# EAGLE board smartThermometer (EAGLE 7.2.0)
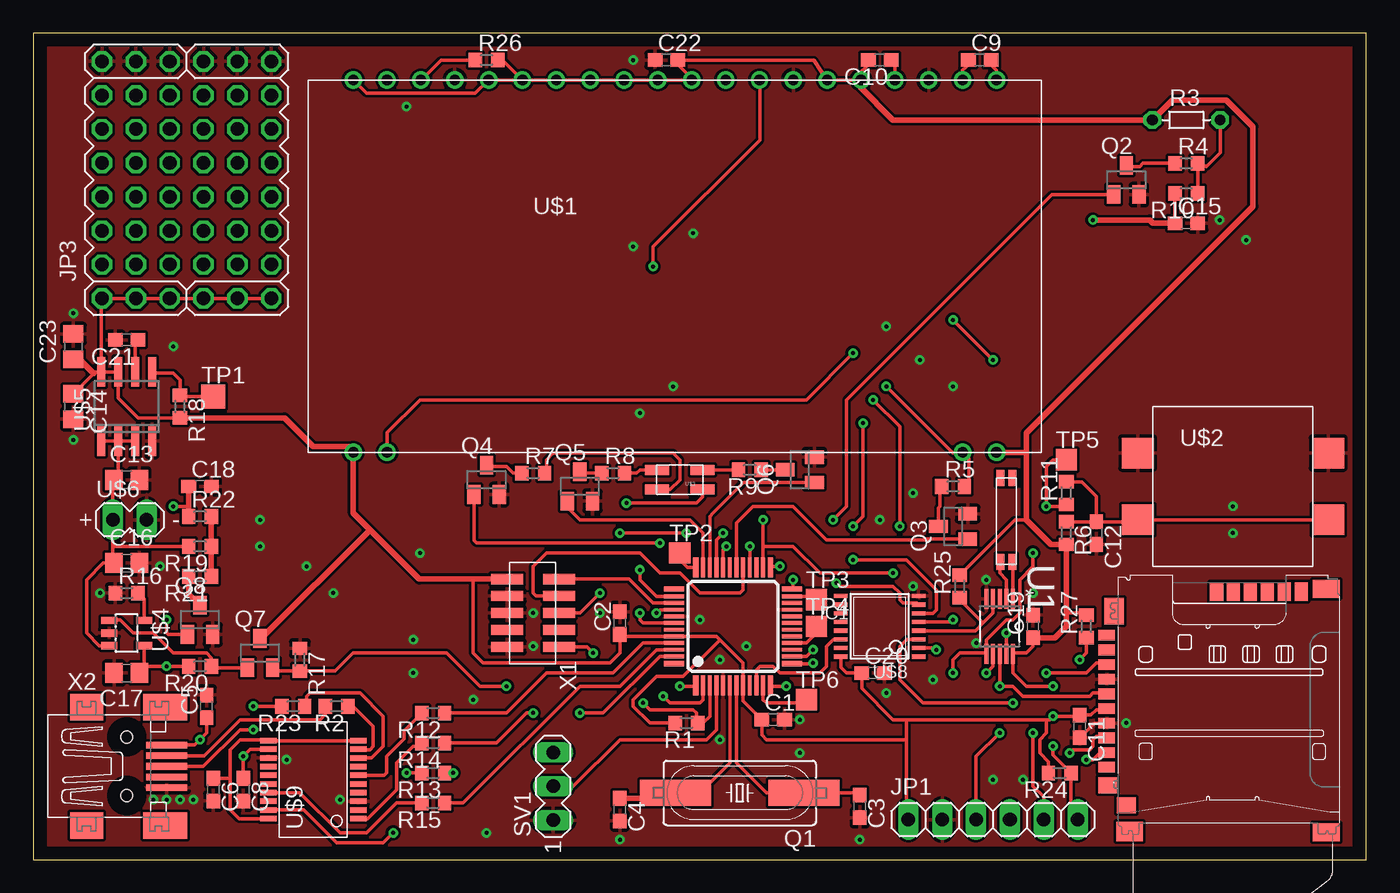
[diagram p0: board, top side]
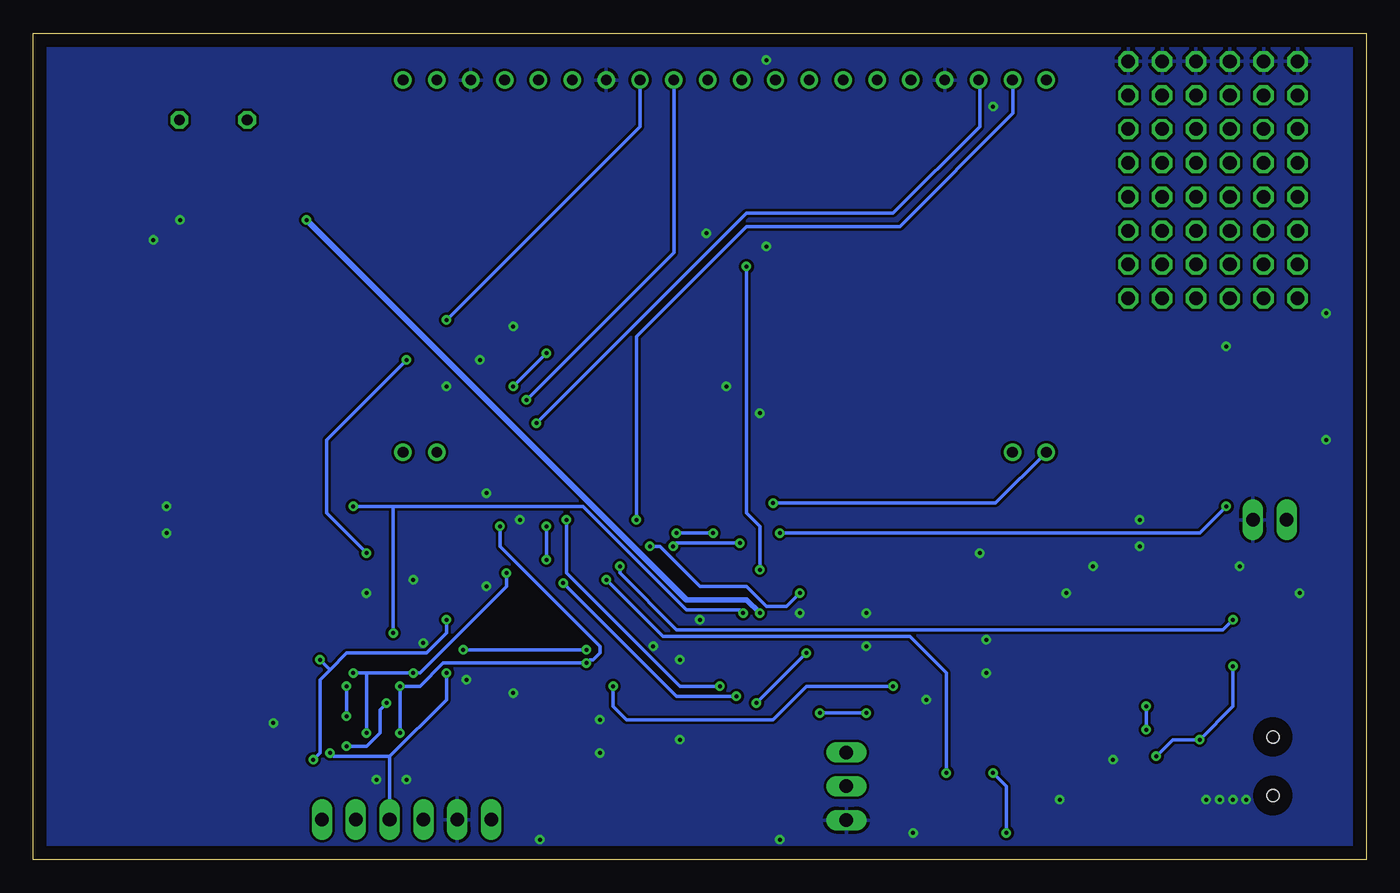
[diagram p1: board, bottom side, seen from below]

Size 100 x 62 mm. Coordinates in mm from the lower left corner, seen from the top.
Outline: 0,0 100,0 100,62 0,62 0,0
Copper layers (1*16): Top 0.035mm / dielectric 1.5mm / Bottom 0.035mm
Design rules "default *": minimum track width 0.2mm, minimum drill 0.3mm, track to track 0.2mm, track to pad 0.2mm, pad to pad 0.2mm, via to via 0.2mm, smd to smd 0mil, copper to edge 40mil, drill to drill 8mil, minimum pad ring 10mil, minimum via ring 8mil, stop-mask expansion 4mil, vias tented up to drill 0mil, thermal gap 10mil

## Footprints (pad centres in the part's own frame; a part is rotated, then mirrored left to right if it is on the bottom)
C0603 = smd 1.1 x 1: 1 -0.85,0; 2 0.85,0
C0805 = smd 1.3 x 1.5: 1 -0.95,0; 2 0.95,0
SOT313-2 = smd 0.4 x 1.5: 1 -2.81,-4.425; 12 2.81,-4.425; 25 2.81,4.425; 36 -2.81,4.425 | smd 0.28 x 1.5: 2 -2.25,-4.425; 3 -1.75,-4.425; 4 -1.25,-4.425; 5 -0.75,-4.425; 6 -0.25,-4.425; 7 0.25,-4.425; 8 0.75,-4.425; 9 1.25,-4.425; 10 1.75,-4.425; 11 2.25,-4.425; 26 2.25,4.425; 27 1.75,4.425; 28 1.25,4.425; 29 0.75,4.425; 30 0.25,4.425; 31 -0.25,4.425; 32 -0.75,4.425; 33 -1.25,4.425; 34 -1.75,4.425; 35 -2.25,4.425 | smd 1.5 x 0.4: 13 4.425,-2.81; 24 4.425,2.81; 37 -4.425,2.81; 48 -4.425,-2.81 | smd 1.5 x 0.28: 14 4.425,-2.25; 15 4.425,-1.75; 16 4.425,-1.25; 17 4.425,-0.75; 18 4.425,-0.25; 19 4.425,0.25; 20 4.425,0.75; 21 4.425,1.25; 22 4.425,1.75; 23 4.425,2.25; 38 -4.425,2.25; 39 -4.425,1.75; 40 -4.425,1.25; 41 -4.425,0.75; 42 -4.425,0.25; 43 -4.425,-0.25; 44 -4.425,-0.75; 45 -4.425,-1.25; 46 -4.425,-1.75; 47 -4.425,-2.25
1X06 = drill 1.016 long: 1 -6.35,0; 2 -3.81,0; 3 -1.27,0; 4 1.27,0; 5 3.81,0; 6 6.35,0
PROTOTYPE8X6 = drill 1.016 octagon: 1 -6.35,-6.35; 2 -3.81,-6.35; 3 -1.27,-6.35; 4 1.27,-6.35; 5 3.81,-6.35; 6 6.35,-6.35; 7 -6.35,-3.81; 8 -3.81,-3.81; 9 -1.27,-3.81; 10 1.27,-3.81; 11 3.81,-3.81; 12 6.35,-3.81; 13 -6.35,-1.27; 14 -3.81,-1.27; 15 -1.27,-1.27; 16 1.27,-1.27; 17 3.81,-1.27; 18 6.35,-1.27; 19 -6.35,1.27; 20 -3.81,1.27; 21 -1.27,1.27; 22 1.27,1.27; 23 3.81,1.27; 24 6.35,1.27; 25 -6.35,3.81; 26 -3.81,3.81; 27 -1.27,3.81; 28 1.27,3.81; 29 3.81,3.81; 30 6.35,3.81; 31 -6.35,6.35; 32 -3.81,6.35; 33 -1.27,6.35; 34 1.27,6.35; 35 3.81,6.35; 36 6.35,6.35; GND1_1 8.89,6.35; GND1_2 8.89,3.81; GND1_3 8.89,1.27; GND2_1 8.89,-1.27; GND2_2 8.89,-3.81; GND2_3 8.89,-6.35; VCC_1 -8.89,-1.27; VCC_2 -8.89,-3.81; VCC_3 -8.89,-6.35; VDD_1 -8.89,6.35; VDD_2 -8.89,3.81; VDD_3 -8.89,1.27
HC49UP = smd 5.334 x 1.93: 1 -4.826,0; 2 4.826,0
SOT23 = smd 1 x 1.4: 1 -0.95,-1.1; 2 0.95,-1.1; 3 0,1.1
R0603 = smd 1 x 1.1: 1 -0.85,0; 2 0.85,0
R-5 = drill 0.813 octagon: 1 -2.54,0; 2 2.54,0
MA03-1 = drill 1.016 long: 1 -2.54,0; 2 0,0; 3 2.54,0
TP18SQ = smd 1.8 x 1.8: TP 0,0
TP16SQ = smd 1.6 x 1.6: TP 0,0
SOP50P490X110-10N = smd 1.499 x 0.3: 1 -2.057,1; 2 -2.057,0.5; 3 -2.057,0; 4 -2.057,-0.5; 5 -2.057,-1; 6 2.057,-1; 7 2.057,-0.5; 8 2.057,0; 9 2.057,0.5; 10 2.057,1
LCD_FOOTPRINT = drill 0.8: 1 0,-27.94; 2 2.54,-27.94; 19 45.72,-27.94; 20 48.26,-27.94; 21 48.26,0; 22 45.72,0; 23 43.18,0; 24 40.64,0; 25 38.1,0; 26 35.56,0; 27 33.02,0; 28 30.48,0; 29 27.94,0; 30 25.4,0; 31 22.86,0; 32 20.32,0; 33 17.78,0; 35 15.24,0; 36 10.16,0; 37 7.62,0; 38 5.08,0; 39 2.54,0; 40 0,0; P$6 12.7,0
PUSHBUTTON-OMRON-B3FS-4002P = smd 2.4 x 2.3: 1 7.15,-2.5; 2 -7.15,-2.5; 3 7.15,2.5; 4 -7.15,2.5
LED-RGB-EVERLIGHT = smd 1.8 x 0.75: 1 1.7,0.725; 2 1.7,-0.725; 3 -1.7,-0.725; 4 -1.7,0.725
SOT23-5L = smd 0.55 x 1.2: 1 -0.95,-1.3; 2 0,-1.3; 3 0.95,-1.3; 4 0.95,1.3; 5 -0.95,1.3
SO08 = smd 0.6 x 2.2: 1 -1.905,-2.6; 2 -0.635,-2.6; 3 0.635,-2.6; 4 1.905,-2.6; 5 1.905,2.6; 6 0.635,2.6; 7 -0.635,2.6; 8 -1.905,2.6
MA02-1+- = drill 1.016 long: 1 -2.54,0; 2 0,0
32.768KHZ = smd 1.2 x 0.6: 1 -3.15,0.45; 2 3.15,0.45; 3 3.15,-0.45; 4 -3.15,-0.45
TSSOP16 = smd 0.305 x 0.991: 1 -2.275,-2.918; 2 -1.625,-2.918; 3 -0.975,-2.918; 4 -0.325,-2.918; 5 0.325,-2.918; 6 0.975,-2.918; 7 1.625,-2.918; 8 2.275,-2.918; 9 2.275,2.918; 10 1.625,2.918; 11 0.975,2.918; 12 0.325,2.918; 13 -0.325,2.918; 14 -0.975,2.918; 15 -1.625,2.918; 16 -2.275,2.918
SSOP20 = smd 0.42 x 1.25: P$1 -2.925,-3.375; P$2 -2.275,-3.375; P$3 -1.625,-3.375; P$4 -0.975,-3.375; P$5 -0.325,-3.375; P$6 0.325,-3.375; P$7 0.975,-3.375; P$8 1.625,-3.375; P$9 2.275,-3.375; P$10 2.925,-3.375; P$11 2.925,3.375; P$12 2.275,3.375; P$13 1.625,3.375; P$14 0.975,3.375; P$15 0.325,3.375; P$16 -0.325,3.375; P$17 -0.975,3.375; P$18 -1.625,3.375; P$19 -2.275,3.375; P$20 -2.925,3.375
HEADER10 = smd 0.76 x 2.4: P1 -2.54,-1.95; P2 -2.54,1.95; P3 -1.27,-1.95; P4 -1.27,1.95; P5 0,-1.95; P6 0,1.95; P7 1.27,-1.95; P8 1.27,1.95; P9 2.54,-1.95; P10 2.54,1.95
32005-301 = smd 3.1 x 0.5: 1 3,1.6; 2 3,0.8; 3 3,0; 4 3,-0.8; 5 3,-1.6 | smd 2.5 x 2: M1 -3,-4.45; M2 -3,4.45 | smd 3.3 x 2: M3 2.9,4.45; M4 2.9,-4.45 | hole 0.9: 0,2.2; 0,-2.2
SIM-CARD_496191611 = smd 2 x 1.35: G1 1,18.938; G2 1,0.675 | smd 2 x 1.45: G3 15.75,18.887 | smd 1.45 x 2: G4 16.925,2.35 | smd 1.25 x 0.8: S1 17.475,4.162; S5 17.475,14.062; T1 17.475,12.963; T2 17.475,11.863; T3 17.475,10.762; T4 17.475,9.662; T5 17.475,8.562; T6 17.475,7.463; T7 17.475,6.362; T8 17.475,5.263 | smd 0.98 x 1.4: S2 9.225,0.9; S3 6.685,0.9; S4 4.145,0.9; S6 7.955,0.9; S7 5.415,0.9; S8 2.875,0.9 | smd 1.4 x 1.2: ST1 17.4,15.412; ST2 16,16.913

## Placement (x,y rotation side)
C1  100n  [C0603]  55.5,10.5 0 top
C2  100n  [C0603]  44,17.75 90 top
C3  18pF  [C0603]  62,4 270 top
C4  18pF  [C0603]  44,3.75 270 top
C5  10n  [C0603]  13,11.5 90 top
C6  100n  [C0603]  13.5,5.25 270 top
C8  100n  [C0603]  15.75,5.25 270 top
C9  100n  [C0603]  71,60 0 top
C10  100u  [C0603]  63.5,60 180 top
C11  100n  [C0603]  78.5,10 270 top
C12  100n  [C0603]  79.75,24.5 270 top
C13  4,7u  [C0805]  7,28.5 0 top
C14  4,7u  [C0805]  3,34 270 top
C15  100n  [C0603]  86.5,47.75 0 top
C16  4,7u  [C0805]  7,22.25 0 top
C17  4,7u  [C0805]  7,14 180 top
C18  100n  [C0603]  12.5,28 0 top
C19  100n  [C0603]  75,17.5 90 top
C20  100n  [C0603]  63,14 0 top
C21  1n  [C0603]  7,39 180 top
C22  100n  [C0603]  47.5,60 0 top
C23  4,7u  [C0805]  3,38.5 90 top
IC1  LPC11C24FBD48  [SOT313-2]  52.5,17.5 0 top
JP1  [1X06]  72,3 0 top
JP3  [PROTOTYPE8X6]  11.5,51 90 top
Q1  12MHz  [HC49UP]  53,5 180 top
Q2  BSS123  [SOT23]  82,51 0 top
Q3  BSS123  [SOT23]  69,25 90 top
Q4  BSS123  [SOT23]  34,28.5 0 top
Q5  BSS123  [SOT23]  41,28 0 top
Q6  BSS123  [SOT23]  57.5,29.25 90 top
Q7  BSS123  [SOT23]  17,15.5 0 top
Q8  BSS123  [SOT23]  12.5,18 0 top
R1  10k  [R0603]  49,10.25 180 top
R2  27  [R0603]  22.75,11.5 180 top
R3  THERMISTOR-5  [R-5]  86.5,55.5 0 top
R4  1k  [R0603]  86.5,52.25 0 top
R5  1k  [R0603]  69,28 0 top
R6  10k  [R0603]  77.5,24.5 270 top
R7  1k  [R0603]  37.5,29 0 top
R8  1k  [R0603]  43.5,29 0 top
R9  1k  [R0603]  53.75,29.25 180 top
R10  1k  [R0603]  86.5,50 180 top
R11  1k  [R0603]  77.5,27.5 90 top
R12  10k  [R0603]  30,11 180 top
R13  10k  [R0603]  30,6.5 180 top
R14  10k  [R0603]  30,8.75 180 top
R15  10k  [R0603]  30,4.25 180 top
R16  2k  [R0603]  7,20 0 top
R17  ???  [R0603]  20,15 270 top
R18  100k  [R0603]  11,34 270 top
R19  2k  [R0603]  12.5,23.5 180 top
R20  10k  [R0603]  12.5,14.5 180 top
R21  2k  [R0603]  12.5,21.25 180 top
R22  1k  [R0603]  12.5,25.75 0 top
R23  27  [R0603]  19.5,11.5 180 top
R24  10k  [R0603]  77,6.5 180 top
R25  10k  [R0603]  69.5,20.5 90 top
R26  10k  [R0603]  34,60 0 top
R27  10k  [R0603]  79,17.5 90 top
SV1  0  [MA03-1]  39,5.5 90 top
TP1  TPTP18SQ  [TP18SQ]  13.5,34.75 0 top
TP2  TPTP16SQ  [TP16SQ]  48.5,23 0 top
TP3  TPTP16SQ  [TP16SQ]  58.75,19.5 0 top
TP4  TPTP16SQ  [TP16SQ]  58.75,17.5 0 top
TP5  TPTP16SQ  [TP16SQ]  77.5,30 0 top
TP6  TPTP16SQ  [TP16SQ]  58,12 0 top
U1  MCP79510-I/MS  [SOP50P490X110-10N]  72.5,17.5 270 top
U$1  EADOGM162W-A  [LCD_FOOTPRINT]  24,58.5 0 top
U$2  PUSHBUTTON-OMRON  [PUSHBUTTON-OMRON-B3FS-4002P]  90,28 0 top
U$3  LED-RGB-EVERLIGHT  [LED-RGB-EVERLIGHT]  48.5,28.5 180 top
U$4  MCP73831/2  [SOT23-5L]  7,17 270 top
U$5  MCP1725  [SO08]  7,34 0 top
U$6  BATT-3.7V  [MA02-1+-]  8.5,25.5 0 top
U$7  CRYSTAL-32.768KHZ-GEYER  [32.768KHZ]  73,25.5 90 top
U$8  DEMUX-1-4-NXP  [TSSOP16]  63.5,17.5 90 top
U$9  FT231XS  [SSOP20]  21,6 90 top
X1  JTAGHEADER  [HEADER10]  37.5,18.5 270 top
X2  MINI-USB-32005-301  [32005-301]  7,7 0 top
X3  SIM-CARD_496191611  [SIM-CARD_496191611]  98,21 180 top

## Library data of the parts
C1-C6 C8-C23 R1 R2 R4-R27 = rcl
IC1 X1 = E7020E
JP1 = pinhead
JP3 = prototyping_small
Q1 = crystal; OC_FARNELL: unknown; OC_NEWARK: unknown
Q2-Q8 = transistor-small-signal
R3 = varistor
SV1 = con-lstb; OC_FARNELL: unknown; OC_NEWARK: unknown
TP1-TP6 = testpad
U1 = Microchip-MCP795xx; MPN: MCP79510-I/MS; OC_FARNELL: 2361124; OC_NEWARK: 47T5346; PACKAGE: 10MSOP; SUPPLIER: MICROCHIP
U$1-U$3 U$5 U$6 U$8 U$9 = user
U$4 = maxim
U$7 = Geyer
X2 = con-cypressindustries; OC_FARNELL: unknown; OC_NEWARK: unknown
X3 = con-molex

## Nets
+3V3: C1.1 C2.1 C10.2 C11.1 C14.1 C19.1 C20.1 C22.2 C23.1 IC1.8 IC1.44 JP1.1 JP3.VCC_1 JP3.VCC_2 JP3.VCC_3 JP3.VDD_1 JP3.VDD_2 JP3.VDD_3 Q7.3 R1.2 R3.1 R6.2 R18.2 R24.2 R25.2 R26.2 R27.2 U1.10 U$1.1 U$1.20 U$1.25 U$1.26 U$1.30 U$1.31 U$1.32 U$1.33 U$1.35 U$1.36 U$1.40 U$1.P$6 U$3.4 U$5.7 U$5.8 U$8.16 X1.P1 X3.T4
+5V: C5.1 C8.1 C17.1 R20.2 U$4.4 U$9.P$12 X2.1
ADC: R3.2 R4.2 R10.1
ADC-BATTERY: C18.1 IC1.33 R22.1
ADC-TEMP: C15.1 IC1.42 R10.2
BAT-ADC-EN: IC1.25 Q8.1
BLUE-PWM: IC1.32 Q4.1
BUTTON#/RTC-MFP#/WAKEUP#: IC1.40 R11.1 TP5.TP U1.9
CHARGING-STATUS: IC1.12 Q7.2 R17.2
CTS#: IC1.24 R13.1
GND: C1.2 C2.2 C3.2 C4.2 C5.2 C6.2 C8.2 C11.2 C12.2 C13.2 C14.2 C15.2 C16.2 C17.2 C18.2 C19.2 C20.2 C21.2 C22.1 C23.2 IC1.5 IC1.21 IC1.41 JP1.2 JP3.GND1_1 JP3.GND1_2 JP3.GND1_3 JP3.GND2_1 JP3.GND2_2 JP3.GND2_3 Q2.2 Q3.2 Q4.2 Q5.2 Q6.2 Q8.2 R16.1 R17.1 SV1.1 U1.5 U$1.23 U$1.27 U$1.37 U$2.3 U$2.4 U$4.2 U$5.4 U$6.2 U$8.8 U$9.P$3 U$9.P$13 X1.P3 X1.P5 X1.P9 X2.5 X3.T3 X3.T6
GPIO-CS0: IC1.10 U$8.14
GPIO-CS1: IC1.14 U$8.2
GREEN-PWM: IC1.35 Q5.1
JTAG_TCLK_SWCLK: IC1.29 X1.P4
JTAG_TMS_SWDIO: IC1.39 X1.P2
JTAG_TMS_SWO: IC1.28 X1.P6
LCD-CS: R26.1 U$1.38 U$8.6
N$1: R2.2 X2.2
N$2: R23.2 X2.3
N$3: C3.1 IC1.7 Q1.1
N$4: C4.1 IC1.6 Q1.2
N$5: C9.2 U$1.21
N$6: C6.1 U$9.P$10 U$9.P$11 U$9.P$20
N$7: C9.1 U$1.22
N$8: C10.1 U$1.24
N$9: Q2.3 R4.1
N$10: R5.2 U$1.2 U$1.19
N$11: Q3.3 R5.1
N$12: R2.1 U$9.P$9
N$13: R8.2 U$3.2
N$14: R7.2 U$3.1
N$15: R9.2 U$3.3
N$16: Q4.3 R7.1
N$17: Q5.3 R8.1
N$18: Q6.3 R9.1
N$19: IC1.4 SV1.2
N$20: C13.1 C16.1 R19.2 U$4.3 U$5.1 U$5.2 U$5.3 U$6.1
N$21: R16.2 U$4.5
N$22: R19.1 R21.1 R22.2
N$23: Q7.1 R20.1 U$4.1
N$24: R14.2 U$9.P$1
N$25: R15.2 U$9.P$17
N$26: C21.1 U$5.6
N$27: R18.1 TP1.TP U$5.5
N$28: R13.2 U$9.P$19
N$29: R12.2 U$9.P$6
N$30: U1.1 U$7.4
N$31: U1.2 U$7.1
N$32: Q8.3 R21.2
N$33: R23.1 U$9.P$8
N$34: IC1.36 TP2.TP
N$35: IC1.23 TP3.TP
N$36: IC1.16 TP4.TP
N$37: IC1.11 TP6.TP
N$38: C12.1 R6.1 R11.2 U$2.1 U$2.2
PWM-BACKLIGHT: IC1.30 Q3.1
RED-PWM: IC1.34 Q6.1
RESET: IC1.3 R1.1 X1.P10
RTS#: IC1.45 R12.1
RXD: IC1.46 R15.1
SPI-CLK: IC1.13 JP1.3 U1.8 U$1.29 X3.T5
SPI-EXT-CS: JP1.6 R24.1 U$8.3
SPI-MASTER-CS: IC1.2 U$8.7
SPI-MISO: IC1.26 JP1.5 U1.7 U$1.39 X3.T7
SPI-MOSI: IC1.38 JP1.4 U1.6 U$1.28 X3.T2
SPI-RTC-CS#: R25.1 U1.4 U$8.4
SPI-SD-CS: R27.1 U$8.5 X3.T1
THERMISTOR-EN: IC1.1 Q2.1
TXD: IC1.47 R14.1

## Tracks (layer width: path | path; a pad name or v marks a point on that pad's centre or on a via)
+3V3  (via drill 0.3, 0.3 pad 0.25)
  Top 0.254: U$5.8 U$5.7 6.37,34.63 7.85,33.15 R18.2 | U$5.8 4.65,36.6 4.53,36.48 C14.1 | C20.1 61.81,14 | 51.5,16.5 51.25,16.75 IC1.44 44.15,16.75 C2.1 44,15.5 43.25,14.75 33.75,14.75 33,15.5 33,21.04 | 51.5,16.5 53.25,14.75 IC1.8 53.25,11.9 C1.1 54.65,9.35 55,9 65.5,9 | 51.5,16.5 48.75,13.75 46.75,13.75 45,12 45,11.5 46.25,10.25 R1.2 | U$8.16 60.58,14.42 61,14 C20.1 | C19.1 75,16 74.5,15.5 73.56,15.5 U1.10 73.5,14 74.5,13 v76.5,13 | C20.1 62.15,12.85 64.5,10.5 65.5,10.5 | 65.5,10.5 76,10.5 | 76,10.5 76.25,10.5 v76.5,10.75 78.4,10.75 C11.1 79.35,10.85 79.75,11.25 80.44,11.25 X3.T4 | U$1.P$6 U$1.36 33.16,57.5 25,57.5 U$1.40 | U$1.P$6 U$1.35 U$1.33 U$1.32 U$1.31 U$1.30 49.4,58.6 48.5,59.5 48.5,59.85 C22.2 58.56,60 U$1.26 U$1.25 62.1,59.1 62.5,59.5 62.5,59.85 C10.2 | U$3.4 50.2,27.2 49.75,26.75 v44.5,26.75 | JP1.1 65.5,3.15 65.5,9 | 65.5,9 65.5,10.5 | U$5.8 5.09,42.05 JP3.VDD_1 JP3.VDD_2 JP3.VDD_3 JP3.VCC_1 JP3.VCC_2 JP3.VCC_3 | R24.2 76.15,7.35 75.5,8 75.5,9 76,9.5 76,10.5 | R25.2 73.65,25.5 74.5,25.5 | R27.2 78.85,18.5 77.5,18.5 | R26.2 35.2,60 U$1.P$6
  Top 0.406: X1.P1 33,21.04 28.96,21.04 25.25,24.75 | 25.25,24.75 24,26 U$1.1 23.94,31 21,31 18.85,33.15 R18.2 | Q7.3 17.1,16.6 25.25,24.75 | C19.1 76.65,16.65 77.5,17.5 77.5,18.5 R6.2 76.35,23.65 74.5,25.5 74.5,30.5 | C23.1 3.45,37.55 4.53,36.48 | 74.5,30.5 74.5,32 91.5,49 91.5,55 89.5,57 85.46,57 R3.1 64.5,55.5 62,58 62,58.4 U$1.25 | U$1.20 74.44,30.56 74.5,30.5
  Bottom 0.254: v76.5,13 v76.5,10.75 | v44.5,26.75 27.81,26.75 U$1.1
+5V  (via drill 0.3)
  Top 0.254: U$4.4 8.3,14.35 C17.1 8.45,14.5 v10,14.5 R20.2 | U$9.P$12 16.27,8.28 v15.75,7.75 C8.1 | X2.1 12.1,8.6 v12.5,9 13,9.5 C5.1
  Bottom 0.254: v15.75,7.75 14.5,9 v12.5,9 10,11.5 v10,14.5
ADC
  Top 0.254: R10.1 R4.2 88,52 89.04,53.04 R3.2
ADC-BATTERY  (via drill 0.3 pad 0.25)
  Top 0.254: IC1.33 51.25,24 v51.75,24.5 | v49,24.5 v44,24.5 | v10.5,26.5 11.65,26.5
  Top 0.406: C18.1 11.65,26.5 R22.1
  Bottom 0.254: v44,24.5 12.5,24.5 v10.5,26.5 | v49,24.5 v51.75,24.5
ADC-TEMP  (via drill 0.3 pad 0.25)
  Top 0.254: R10.2 C15.1 | IC1.42 45.75,17.75 45.5,18 v45.5,18.5
  Top 0.406: v79.5,48 83.75,48 84,47.75 C15.1
  Bottom 0.406: v79.5,48 51,19.5 46.5,19.5 v45.5,18.5
BAT-ADC-EN  (via drill 0.3 pad 0.25)
  Top 0.254: Q8.1 10.1,16.9 10,17 v10,18 | v56,22 55.38,22 IC1.25
  Bottom 0.254: v56,22 56,21.5 51.75,17.25 10.75,17.25 v10,18
BLUE-PWM  (via drill 0.3, 0.3 pad 0.25)
  Top 0.254: Q4.1 33.05,23.95 33.25,23.75 v47,23.75 | IC1.32 51.75,23.25 v52,23.5
  Bottom 0.254: v52,23.5 51.75,23.75 v47,23.75
BUTTON#/RTC-MFP#/WAKEUP#  (via drill 0.3)
  Top 0.254: IC1.40 47,18.75 v46.75,18.5 | R11.1 77.35,26.5 v76,26.5 76,29.5 76.5,30 TP5.TP | U1.9 v73,17
  Bottom 0.254: v46.75,18.5 47,18.75 51,18.75 58.75,26.5 73,26.5 | v76,26.5 73,26.5 | v73,17 73,26.5
CHARGING-STATUS  (via drill 0.3 pad 0.25)
  Top 0.254: Q7.2 18.2,14.15 R17.2 22.65,14.15 24,15.5 31,15.5 33.5,13 v35.5,13 | v56.5,13 55.38,13 IC1.12
  Bottom 0.254: v35.5,13 42,13 44.5,10.5 55.5,10.5 56.5,11.5 v56.5,13
CTS#  (via drill 0.3 pad 0.25)
  Top 0.254: v57,21 57,20.39 IC1.24 | v31.5,6.5 R13.1
  Bottom 0.254: v31.5,6.5 31.5,14 34.25,16.75 52.75,16.75 v57,21
GND  (via drill 0.3, 0.3 pad 0.25)
  Top 0.254: C11.2 79.59,10.24 X3.T3
  other vias: 66,20.5 64,12.5 51.5,9 57.5,10.5 42.5,18.5 5,20 45,60 51.5,15 50,18 53.5,16 17,25.5 17,23.5 10.5,38.5 12,4.5 34,2 33,12 28.5,14 19,7.5 23,4.5 28.5,16.5 20.5,22 22.5,20 29,23 45.5,33.5 48,35.5 28,56.5 89,48 91,46.5 90,24.5 90,26.5 75,20 37.5,18.5 37.5,16 45,46 49.5,47 82,10.25 71.5,21 66.5,37.5 69,35.5 11,4.5 10,4.5 9,4.5 9.5,22 3,41 3,31.5 74.25,6 72,6 62,1.5 44,1.5 57.5,8 64,40 70.75,16.25 67.5,13.5 66,27.5 63.5,25.5
  pour Top: -0.5,62.5 101,62.5 101,-1.5 -0.5,-1.5
  pour Bottom: -0.5,63 101,63 101,-1.5 -0.5,-1.5
GPIO-CS0
  Top 0.254: IC1.10 54.25,14.25 54.5,14.5 55.5,14.5 56,14 59,14 59.5,14.5 59.5,16 60,16.5 60.56,16.5 U$8.14
GPIO-CS1  (via drill 0.3 pad 0.25)
  Top 0.254: IC1.14 58,15.25 v58.5,15.75 | U$8.2 67.62,15.88 v67.75,15.75
  Bottom 0.254: v58.5,15.75 v67.75,15.75
GREEN-PWM
  Top 0.254: Q5.1 40.05,26.45 41,25.5 49.25,25.5 50.25,24.5 IC1.35
JTAG_TCLK_SWCLK
  Top 0.254: X1.P4 37.73,19.77 37.5,20 37.5,22 38.5,23 45.5,23 47,21.5 48.5,21.5 50,20 53,20 53.25,20.25 IC1.29
JTAG_TMS_SWDIO
  Top 0.254: X1.P2 44.71,21.04 46.5,19.25 IC1.39
JTAG_TMS_SWO  (via drill 0.3, 0.3 pad 0.25)
  Top 0.254: X1.P6 41,18.5 v42.5,20 | v53.75,23.5 IC1.28
  Bottom 0.254: v53.75,23.5 53,23.5 50,20.5 46.5,20.5 45,19 43.5,19 v42.5,20
LCD-CS  (via drill 0.3, 0.3 pad 0.25)
  Top 0.254: U$8.6 67.47,18.48 67.75,18.75 67.75,20.25 65.5,22.5 v61.5,22.5 | v62.25,32.75 62.25,25.75 v61.5,25 | R26.1 30.58,60 U$1.38
  Bottom 0.254: v62.25,32.75 46.5,48.5 35.5,48.5 29,55 29,58.42 U$1.38 | v61.5,22.5 v61.5,25
N$1
  Top 0.254: X2.2 12.8,7.8 15.5,10.5 21.5,10.5 21.9,10.9 R2.2
N$2  (via drill 0.3)
  Top 0.254: X2.3 12.75,7 15.5,9.75 v16.5,9.75 | v16.5,11.5 R23.2
  Bottom 0.254: v16.5,9.75 v16.5,11.5
N$3
  Top 0.254: IC1.7 52.75,7.25 55,5 Q1.1 61.85,5 C3.1
N$4
  Top 0.254: 48.29,4.7 Q1.2 50,5 52.25,7.25 IC1.6
  Top 0.406: C4.1 47.77,4.6 Q1.2
N$5
  Top 0.254: U$1.21 72.26,59.24 72,59.5 72,59.85 C9.2
N$6
  Top 0.254: U$9.P$10 U$9.P$11 17.55,9 15.5,9 14.75,8.25 14.75,6 | U$9.P$20 15.43,3.08 14.75,3.75 14.75,6 | C6.1 14.65,6.1 14.75,6
N$7
  Top 0.254: U$1.22 69.72,59.22 70,59.5 70,59.85 C9.1
N$8
  Top 0.254: U$1.24 64.64,59.71 C10.1
N$9
  Top 0.254: R4.1 83.25,52.25 83,52 82.1,52 Q2.3
N$10  (via drill 0.3 pad 0.25)
  Top 0.254: R5.2 70.2,28.2 70.2,30.08 U$1.19 69.66,30.5 69,30.5 v64,35.5 | U$1.2 26.54,32.04 29,34.5 58,34.5 v61.5,38
  Bottom 0.254: v61.5,38 v64,35.5
N$11
  Top 0.254: Q3.3 67.9,26.4 68,26.5 68,27.85 R5.1
N$12
  Top 0.254: R2.1 24,11.5 25.5,10 25.5,8.5 25.25,8.25 24.4,8.25 U$9.P$9
N$13
  Top 0.254: R8.2 45.25,29 45.5,29.25 46.77,29.25 U$3.2
N$14
  Top 0.254: 46.77,27.77 U$3.1 47.77,27.77 48.5,28.5 48.5,30 48,30.5 39,30.5 38.5,30 38.5,29.15 R7.2
N$15
  Top 0.254: U$3.3 52.88,29.23 R9.2
N$16
  Top 0.254: R7.1 36,29 35.5,29.5 34.1,29.5 Q4.3
N$17
  Top 0.254: R8.1 41.1,29 Q5.3
N$18
  Top 0.254: Q6.3 R9.1
N$19
  Top 0.254: IC1.4 51.25,9.75 50.5,9 44,9 40.5,5.5 SV1.2
N$20
  Top 0.254: 5.96,23.5 U$6.1 5.96,28.41 C13.1 6.37,28.82 U$5.2 | 5.96,23.5 5.96,22.09 C16.1 5.25,22.25 4,21 4,17 4.95,16.05 U$4.3 | R19.2 5.96,23.5 | U$5.3 U$5.2 | U$5.1 U$5.2
N$21
  Top 0.254: U$4.5 8.3,19.55 R16.2
N$22
  Top 0.406: R22.2 R19.1 R21.1
N$23
  Top 0.254: Q7.1 13.45,14.4 R20.1 13.35,15.15 13,15.5 10.5,15.5 9,17 7.5,17 6.5,18 5.75,18 U$4.1
N$24
  Top 0.254: U$9.P$1 25.07,3.08 27.25,5.25 27.25,7.25 28.5,8.5 28.9,8.5 R14.2
N$25
  Top 0.254: U$9.P$17 19.98,5.03 23,2 25,2 27.25,4.25 R15.2 29.25,4.15
N$26
  Top 0.254: U$5.6 7.63,38.78 C21.1
N$27
  Top 0.254: U$5.5 9.01,36.5 10.5,36.5 11,36 R18.1 11,34.75 TP1.TP
N$28  (via drill 0.3)
  Top 0.254: U$9.P$19 20.27,3.73 22.75,1.25 26.25,1.25 v27,2 | v28,6.5 R13.2
  Bottom 0.254: v27,2 27,5.5 v28,6.5
N$29
  Top 0.254: R12.2 27.82,9.68 27.82,9.07 26.5,7.75 26.5,6.5 26.32,6.33 U$9.P$6
N$30
  Top 0.254: U1.1 73.5,22 73.45,22 U$7.4
N$31
  Top 0.254: U1.2 73,21 72.5,21.5 72.5,22.3 U$7.1
N$32
  Top 0.406: R21.2 11.65,19.95 Q8.3
N$33
  Top 0.254: U$9.P$8 25.38,7.62 26.25,8.5 26.25,10.75 24.5,12.5 20.75,12.5 20.5,12.25 20.5,11.65 R23.1
N$34
  Top 0.254: IC1.36 49.08,21.93 48.5,22.5 TP2.TP
N$35
  Top 0.254: IC1.23 58.25,19.75 TP3.TP
N$36
  Top 0.254: IC1.16 58,16.25 58.5,16.75 58.5,17.25 TP4.TP
N$37
  Top 0.254: IC1.11 54.75,12 55,11.75 57.75,11.75 TP6.TP
N$38
  Top 0.254: C12.1 82.7,25.35 U$2.2 U$2.1 | C12.1 R6.1 | R11.2 78.65,28.35 79.75,27.25 C12.1
PWM-BACKLIGHT
  Top 0.254: Q3.1 67,24.05 | 67,24.05 66.95,24.05 | IC1.30 52.75,25.25 54,26.5 57,26.5 59.5,24 66.95,24 67,24.05
RED-PWM
  Top 0.254: Q6.1 53.3,28.3 53.25,28.25 51,26 50.75,25.75 IC1.34
RESET  (via drill 0.3)
  Top 0.254: IC1.3 50.75,10.75 50.25,10.25 R1.1 49.75,10.35 49.75,11 49.5,11.25 46.25,11.25 v45.75,11.75 | X1.P10 41.54,15.96 v42,15.5
  Bottom 0.254: v42,15.5 v45.75,11.75
RTS#
  Top 0.254: IC1.45 45.75,16.25 43.5,14 38.5,14 35.5,11 R12.1
RXD
  Top 0.254: IC1.46 46.75,15.75 44,13 41,13 32.25,4.25 R15.1
SPI-CLK  (via drill 0.3, 0.3 pad 0.25)
  Top 0.254: IC1.13 58.44,14.69 v58.5,14.75 | U1.8 v72.5,13 73.5,13 74.25,12.25 79.25,12.25 79.5,12.5 80.46,12.5 X3.T5 | JP1.3 70.73,7.73 v72.5,9.5 | v65,25 65,32.5 v63,34.5
  Bottom 0.254: U$1.29 51.94,45.56 v63,34.5 | v65,25 65,23.5 57.5,16 57.5,15.5 58,15 58.25,15 v58.5,14.75 69.25,14.75 71,13 v72.5,13 v72.5,9.5
SPI-EXT-CS  (via drill 0.3)
  Top 0.254: U$8.3 65.53,16.52 65,16 65,13.5 66.75,11.75 v73.5,11.75 | JP1.6 77.85,3.5 R24.1 76.5,7.85 v76.5,8.5
  Bottom 0.254: v73.5,11.75 74,11.25 74,9.5 75,8.5 v76.5,8.5
SPI-MASTER-CS  (via drill 0.3 pad 0.25)
  Top 0.254: IC1.2 50.25,12 50,11.75 47.75,11.75 v47.25,12.25 47.5,12 | U$8.7 66.29,19.25 65.25,19.25 65,19.5 65,20 64.5,20.5 60.5,20.5 v60.25,20.75
  Bottom 0.254: v47.25,12.25 51.75,12.25 v60.25,20.75
SPI-MISO  (via drill 0.3, 0.3 pad 0.25)
  Top 0.254: IC1.26 54.75,23.5 | 54.75,23.5 v54.75,25.5 | U1.7 72,14.5 v71.5,14 | v64.5,21.5 59,21.5 57,23.5 54.75,23.5 | v76,14 79,14 79.75,14.75 80.41,14.75 X3.T7 | JP1.5 75.81,4.69 75,5.5 v75,9.5
  Bottom 0.254: v54.75,25.5 54.75,39.25 46.5,47.5 35,47.5 26.5,56 26.5,58.46 U$1.39 | 75,14 v71.5,14 71,14 64.5,20.5 v64.5,21.5 | 75,14 v76,14 | v75,9.5 75,14
SPI-MOSI  (via drill 0.3 pad 0.25)
  Top 0.254: 71.5,15 U1.6 71.44,15.5 | IC1.38 46.75,19.75 45.5,21 v45.5,21.75 | v46.5,44.5 46.5,46 54.5,54 54.5,58.98 U$1.28 | v69,14 69,15 69.5,15.5 71.44,15.5 | 71.44,15.5 71.5,15.5 71.5,16.5 73,18 73.5,18 74,18.5 74,21 75,22 v75,23 | v72,37.5 v69,40.5 | X3.T2 80.41,9.25 79.75,9.25 79.5,9 79.5,8.5 79.25,8.25 78,8.25 v77.75,8
  Bottom 0.254: v69,14 69,12 73.27,7.73 | v75,23 78,26 78,31.5 v72,37.5 | v69,40.5 54.5,55 54.5,58.98 U$1.28 | 73.27,7.73 JP1.4 | 73.27,7.73 77.48,7.73 v77.75,8 | v45.5,21.75 45.5,25 46.5,26 v46.5,44.5
SPI-RTC-CS#
  Top 0.254: U$8.4 70.67,17.18 71.25,17.75 | 71.25,17.75 72,18.5 U1.4 | 71.25,17.75 69.5,19.5 R25.1
SPI-SD-CS  (via drill 0.3, 0.3 pad 0.25)
  Top 0.254: U$8.5 68.83,17.82 v69,18 | v79,7.5 79.5,7.5 80,8 80.49,8 X3.T1 | R27.1 79,15.5 v78.5,15
  Bottom 0.254: v69,18 69,17 70.5,15.5 76.5,15.5 77.75,14.25 | 77.75,14.25 78.5,13.5 78.5,8 v79,7.5 | v78.5,15 77.75,14.25
THERMISTOR-EN  (via drill 0.3 pad 0.25)
  Top 0.254: v48.5,13 49.62,13 IC1.1 | Q2.1 76.4,49.9 61,34.5 61,26.5 v60,25.5
  Bottom 0.254: v60,25.5 60,21.5 51.5,13 v48.5,13
TXD  (via drill 0.3)
  Top 0.254: IC1.47 47,15.25 42.75,11 v41,11 | v37.5,11 37,11 34.75,8.75 R14.1
  Bottom 0.254: v41,11 v37.5,11